# Altium PCB Solo Board1.PcbDoc
Units mil, origin at the board's own origin, x right, y up, seen from the top; angles counter-clockwise.
Board outline 1985.03 x 3045.03 mil, 4 copper layers (Top Layer, Layer 1, Layer 2, Bottom Layer), stack 23.756 mil thick; 35 components, 31 nets, 168 pads, 5 vias.
Unrouted connection lines stored in the file: 40.
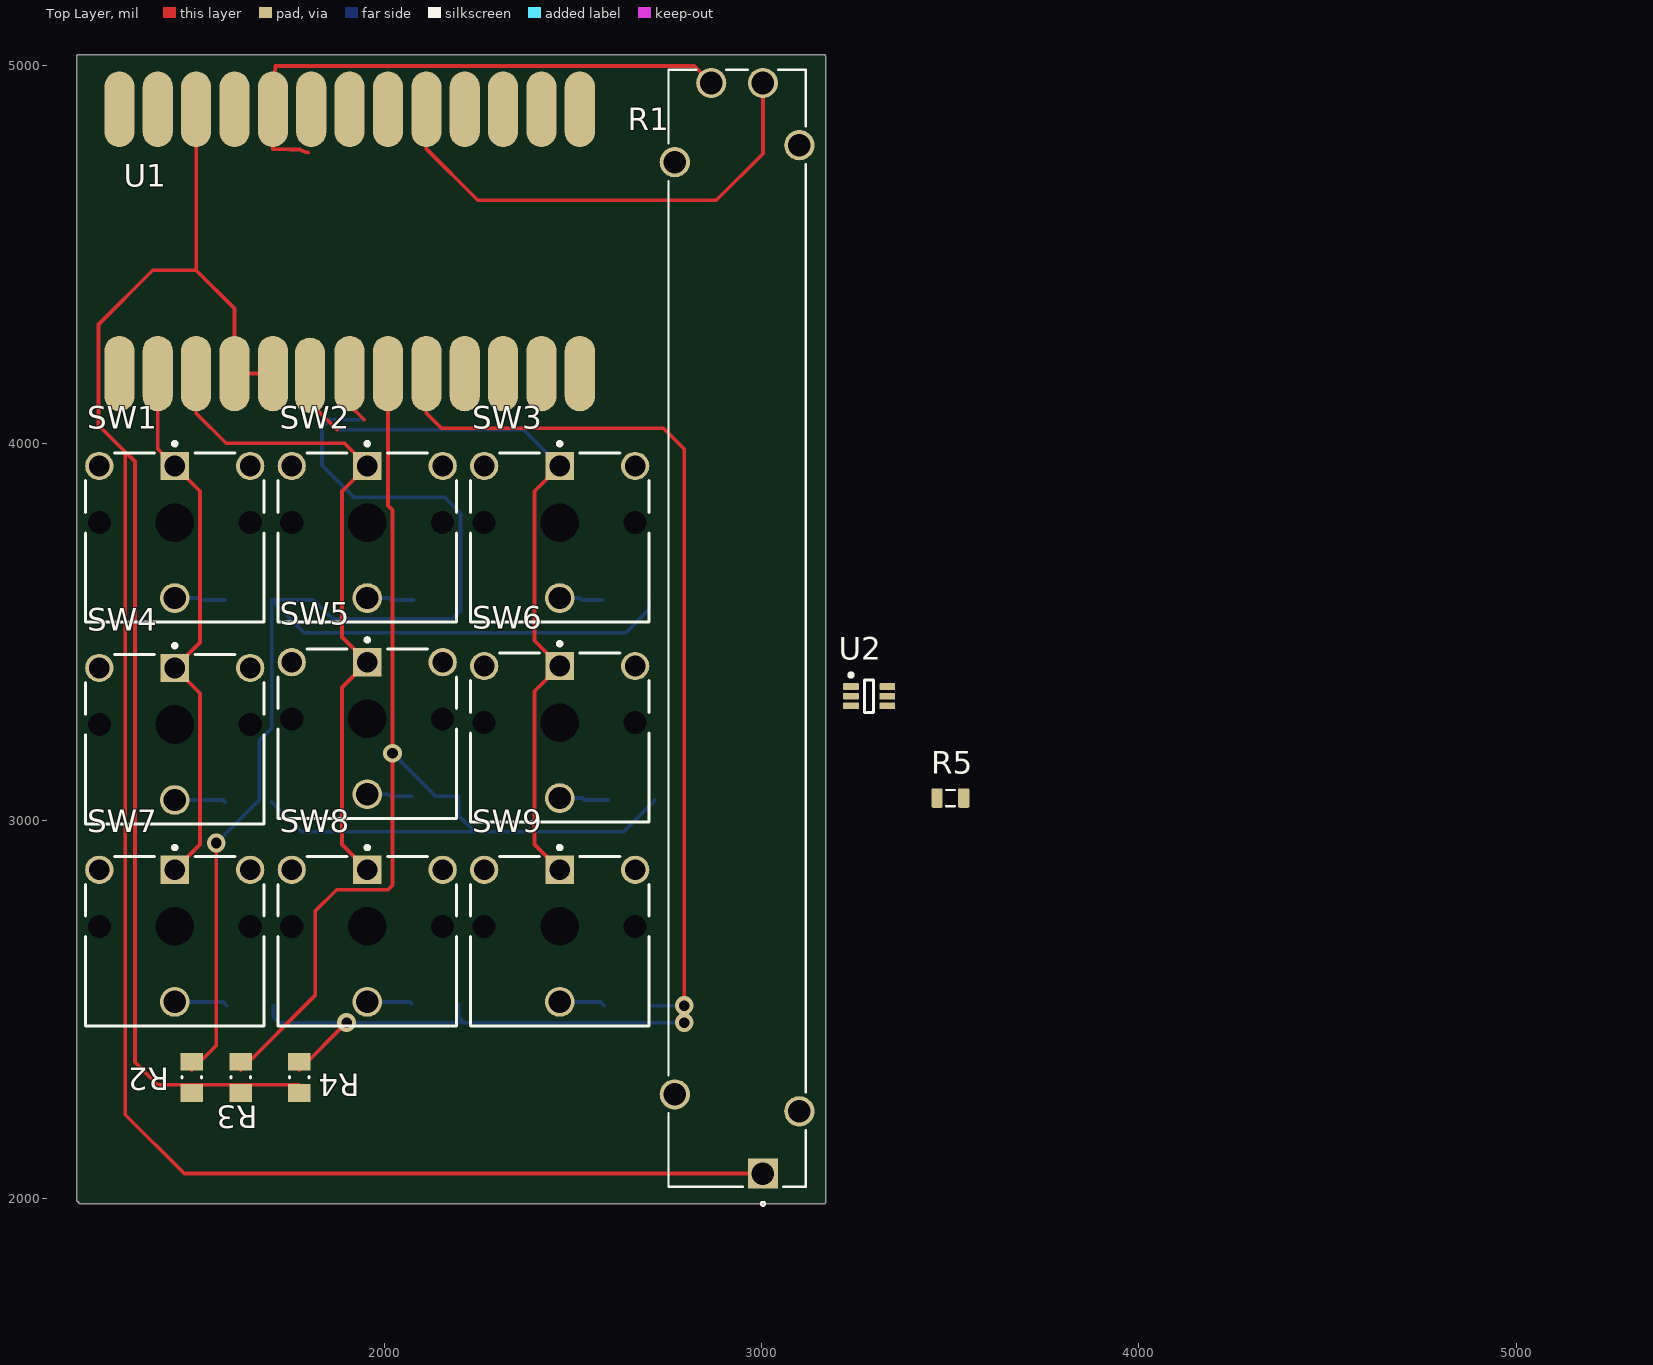
[diagram p0: Top Layer view]
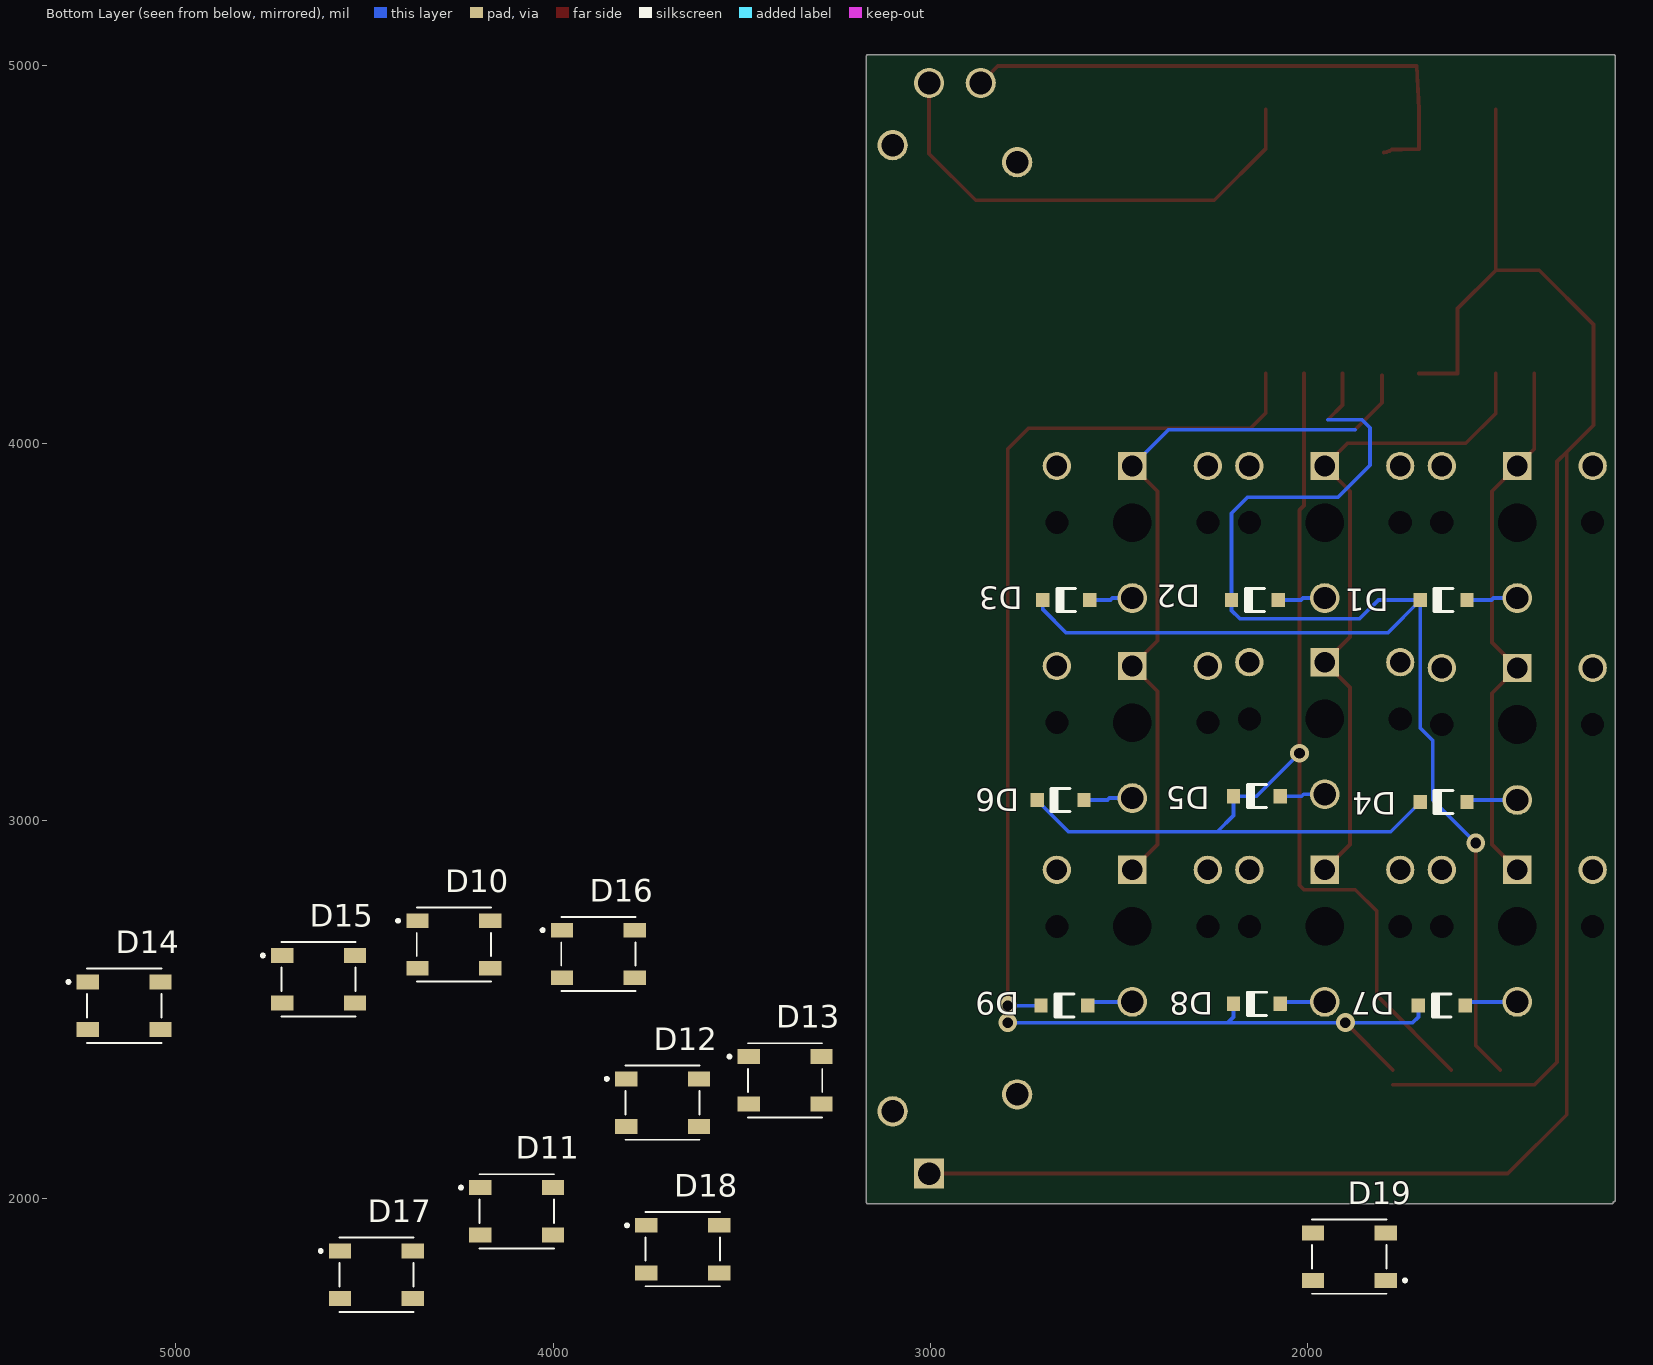
[diagram p1: Bottom Layer view, seen from below]
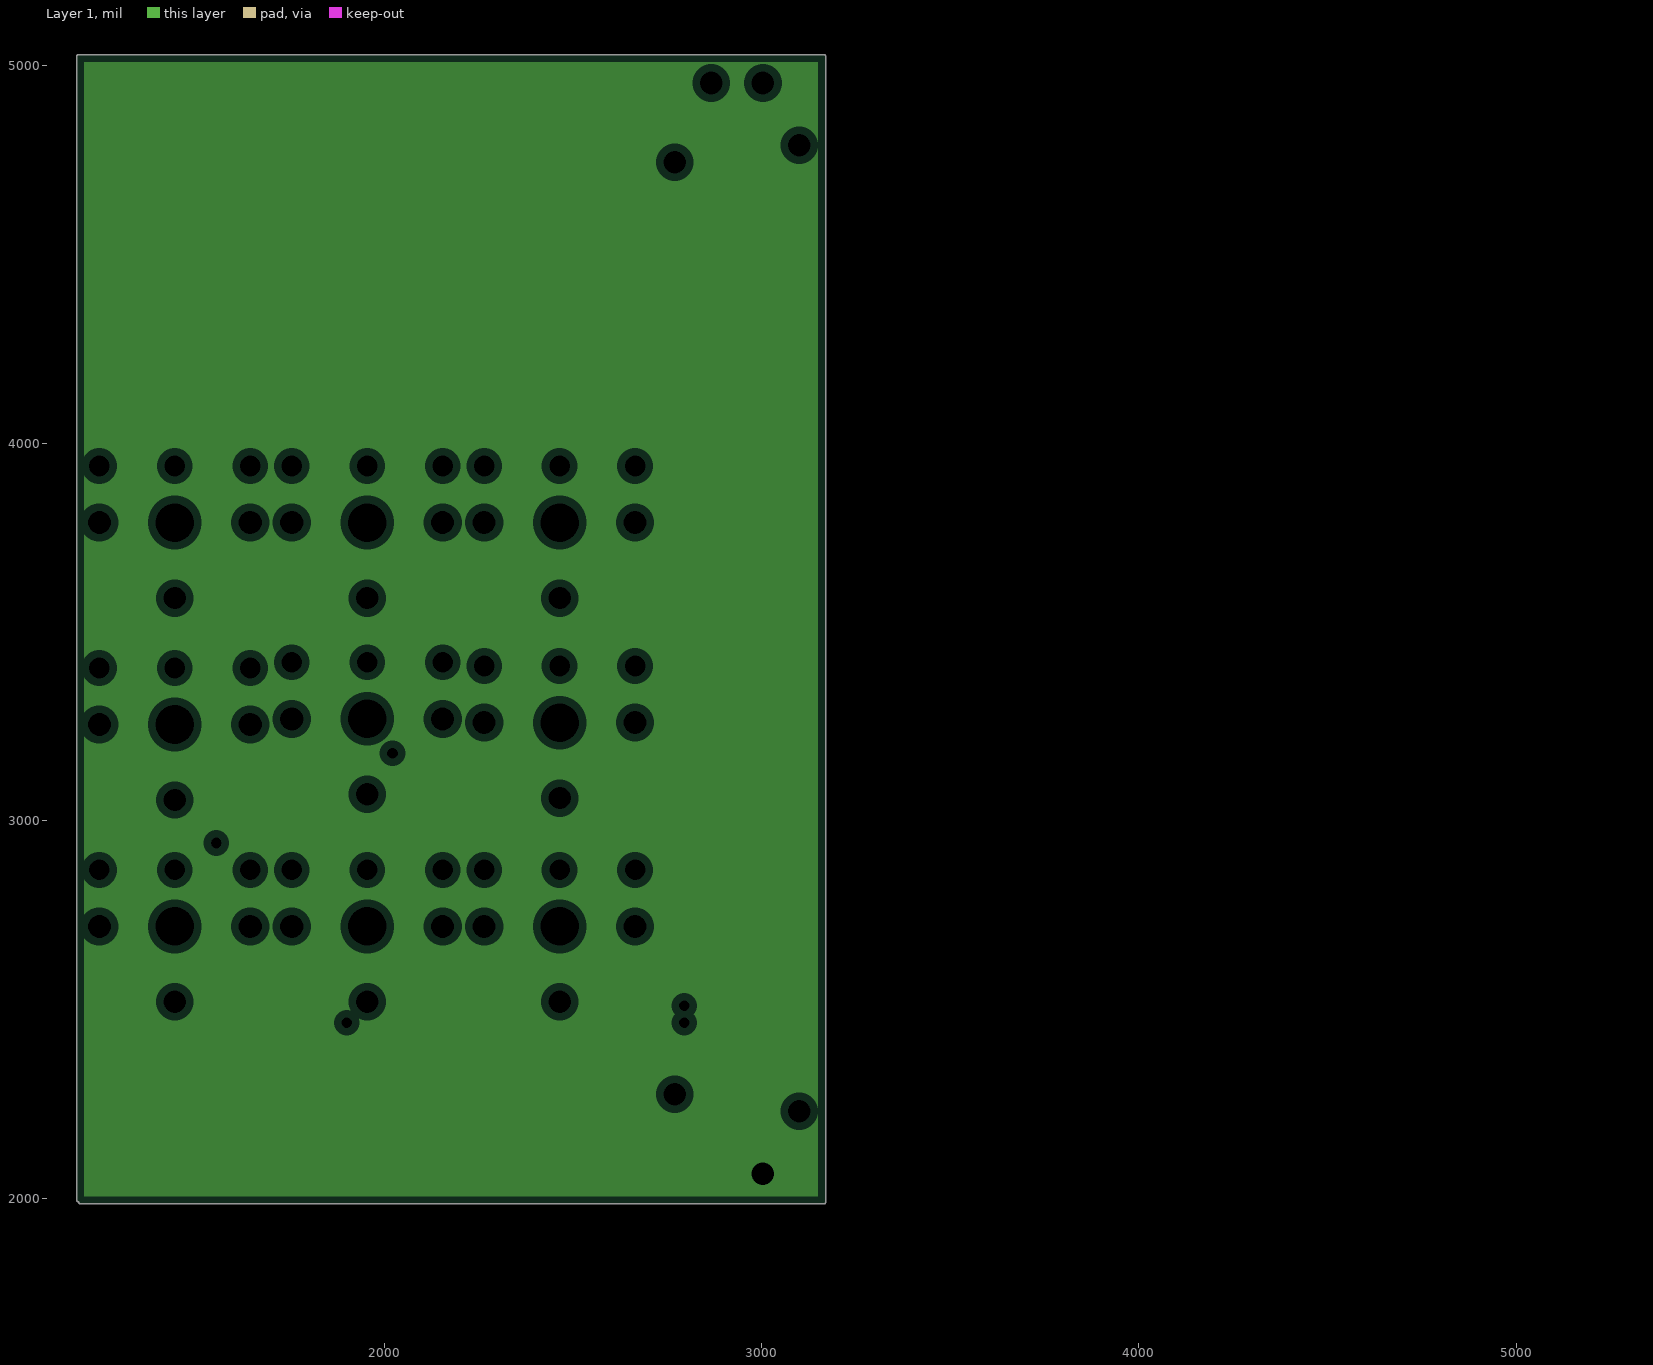
[diagram p2: Layer 1, clearances drawn from the general rule]
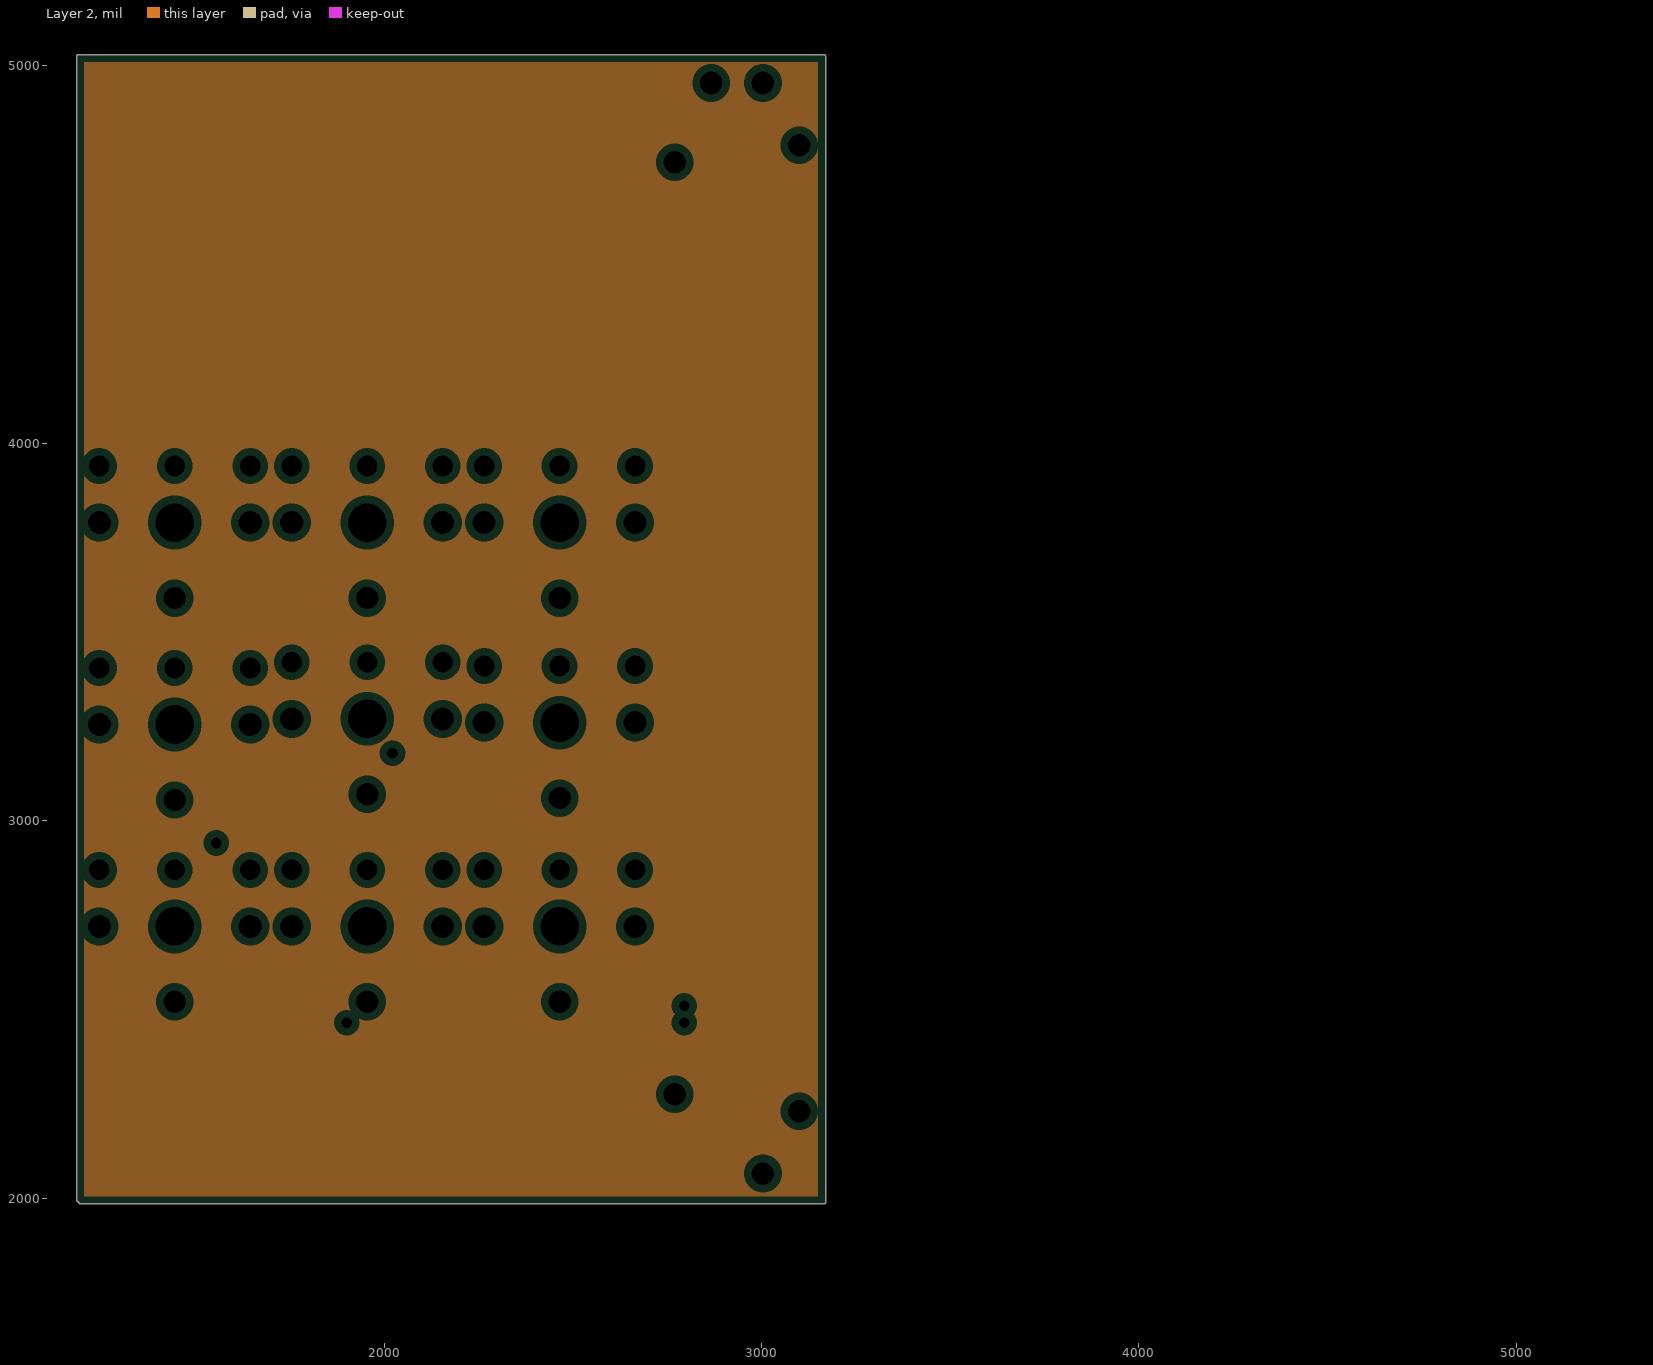
[diagram p3: Layer 2, clearances drawn from the general rule]

## Layer stack, top to bottom
Top Solder: solder mask 0.4, Solder Resist, Dk 3.5
Top Layer: signal copper 1.4
Dielectric 2: prepreg 2.8, PP-006, Dk 4.1
Layer 1: plane copper 1.378, net GND
Dielectric 1: dielectric 12.6, FR-4, Dk 4.8
Layer 2: plane copper 1.378, net +5
Dielectric 3: prepreg 2.8, PP-006, Dk 4.1
Bottom Layer: signal copper 1.4
Bottom Solder: solder mask 0.4, Solder Resist, Dk 3.5

## Board outline
1189.98,1989.98 cw(c1190,1995) 1184.98,1995 1184.98,2120 1184.98,5025 cw(c1190,5025) 1190,5030.02 3165,5030.02 cw(c3165,5025) 3170.01,5025 3170.01,1995 3170.01,1990 cw(c3165,1990) 3165,1984.98 1195,1984.98 cw(c1195,1990)

## Design rules (kind name [scope] priority, off if disabled: settings)
Clearance [All] p1: gap=10 ignorepadtopadclearanceinfootprint=FALSE
PlaneClearance [All] p1: clearance=20
PlaneConnect [All] p1: planeconnectstyle=Relief reliefexpansion=20 reliefentries=4 reliefconductorwidth=10 reliefairgap=10
PolygonConnect [All] p1: connectstyle=Relief reliefconductorwidth=10 reliefentries=4 polygonreliefangle="90 Angle" airgapwidth=10
RoutingVias [All] p1: holewidth=28 width=50 viastyle="Through Hole" minholewidth=28 minwidth=50 maxholewidth=28 maxwidth=50
SolderMaskExpansion [All] p1: expansion=4 istentingtop=FALSE
SupplyNets "Schematic Supply Nets_2" [InNet('+5')] p1: voltage=0.000
SupplyNets "Schematic Supply Nets_1" [InNet('GND')] p2: voltage=0.000
SupplyNets "Schematic Supply Nets" [InNet('3V3')] p3: voltage=0.000
Width [All] p1: maxlimit=10 minlimit=10 preferedwidth=10
28 further rules are at their usual default settings.

## Components (designator, comment, footprint, x,y, rotation, side; value= is the part's Value field where it differs from the comment)
D1 "1N4148W-7-F" DIOD-SOD123-2_V 1640,3585 r0 bottom
D2 "1N4148W-7-F" DIOD-SOD123-2_V 2140,3585 r0 bottom
D3 "1N4148W-7-F" DIOD-SOD123-2_V 2640,3585 r0 bottom
D4 "1N4148W-7-F" DIOD-SOD123-2_V 1640,3050 r0 bottom
D5 "1N4148W-7-F" DIOD-SOD123-2_V 2135,3065 r0 bottom
D6 "1N4148W-7-F" DIOD-SOD123-2_V 2655,3055 r0 bottom
D7 "1N4148W-7-F" DIOD-SOD123-2_V 1645,2510 r0 bottom
D8 "1N4148W-7-F" DIOD-SOD123-2_V 2135,2515 r0 bottom
D9 "1N4148W-7-F" DIOD-SOD123-2_V 2645,2510 r0 bottom
D10 "1655" LED_1655 4262.76,2672.01 r180 bottom
D11 "1655" LED_1655 4096.3,1965 r180 bottom
D12 "1655" LED_1655 3709.84,2252.99 r180 bottom
D13 "1655" LED_1655 3384.84,2312.01 r180 bottom
D14 "1655" LED_1655 5136.3,2510 r180 bottom
D15 "1655" LED_1655 4621.3,2580 r180 bottom
D16 "1655" LED_1655 3879.84,2647.01 r180 bottom
D17 "1655" LED_1655 4467.76,1797.01 r180 bottom
D18 "1655" LED_1655 3656.3,1865 r180 bottom
D19 "1655" LED_1655 1890,1845 r0 bottom
R1 "PTA6043-2015DPB103" POT_PTA6043 3003.5,2065 r180 top
R2 "Resistor 10k +/-1% 0805 125 mW" RESC2013X50X35ML15T15 1490,2320 r90 top value=10k
R3 "Resistor 10k +/-1% 0805 125 mW" RESC2013X50X35ML15T15 1620,2320 r90 top value=10k
R4 "Resistor 10k +/-1% 0805 125 mW" RESC2013X50X35ML15T15 1775,2320 r90 top value=10k
R5 "Resistor 470R +/-5% 0805 125 mW" RESC0805(2012)_L 3500.43,3060 r0 top value=470
SW1 "ML1A-11JW" CHRY-ML1A-11JW_V 1445,3790 r0 top
SW2 "ML1A-11JW" CHRY-ML1A-11JW_V 1955,3790 r0 top
SW3 "ML1A-11JW" CHRY-ML1A-11JW_V 2465,3790 r0 top
SW4 "ML1A-11JW" CHRY-ML1A-11JW_V 1445,3255 r0 top
SW5 "ML1A-11JW" CHRY-ML1A-11JW_V 1955,3270 r0 top
SW6 "ML1A-11JW" CHRY-ML1A-11JW_V 2465,3260 r0 top
SW7 "ML1A-11JW" CHRY-ML1A-11JW_V 1445,2720 r0 top
SW8 "ML1A-11JW" CHRY-ML1A-11JW_V 1955,2720 r0 top
SW9 "ML1A-11JW" CHRY-ML1A-11JW_V 2465,2720 r0 top
U1 "KB2040" KB2040 1258.33,4180 r0 top
U2 "SN74LVC1T45DCKR" DCK0006A_M 3285,3330 r0 top

## Footprints (in the part's own frame and the unit in brackets; to place one, negate y for a bottom-side part, rotate by r counter-clockwise, add the part's x,y. Pads: shape width x height; smd on the part's side, far side on the other; paste and mask are expansions set on the pad)
CHRY-ML1A-11JW_V [mm] "Switch, 4-Leads, Body 12x11.4mm"
  rect 1.9x1.9 hole 1.4 paste-2539.97: 1(0,3.81)
  round 2 hole 1.5 paste-2539.97: 2(0,-5.08)
  round 1.9 hole 1.4 paste-2539.97: 3(-5.08,3.81) 4(5.08,3.81)
  round 0 hole 2.6 unplated paste-2539.97: MH1(0,0)
  round 0 hole 1.55 unplated paste-2539.97: MH2(-5.08,0) MH3(5.08,0)
  silkscreen extent -6,-6.7 6,5.43, body extent -6,-6.7 6,4.7, height 6.9
DCK0006A_M [mm] "SOT23, 6-Leads, Body 2.15x1.4mm, Pitch 0.65mm, IPC Low Density"
  rrect22% 1.05x0.45 smd: 1(-1.225,0.65) 2(-1.225,0) 3(-1.225,-0.65) 4(1.225,-0.65) 5(1.225,0) 6(1.225,0.65)
  silkscreen extent -1.35,-1.1 0.3,1.55, body extent -1.14,-1 1.14,1, height 0.94
DIOD-SOD123-2_V [mm] "SOD123, 2-Leads, Body 2.7x1.55mm, Height 1.45mm"
  rect 0.9x0.95 smd: 1(-1.575,0) 2(1.575,0)
  silkscreen extent -0.64,-0.82 0.64,0.78, body extent -1.35,-0.77 1.35,0.77, height 1.45
KB2040 [mil]
  oval 80x200 smd: 107(40,5) 108(141.67,5) 109(243.33,5) 110(345,5) 111(446.67,5) 112(545,0) 113(650,5) 114(751.67,5) 115(853.33,5) 116(955,5) 117(1056.67,5) 118(1158.33,5) 119(1260,5) 120(40,705) 121(141.67,705) 122(243.33,705) 123(345,705) 124(446.67,705) 125(548.33,705) 126(650,705) 127(751.67,705) 128(853.33,705) 129(955,705) 130(1056.67,705) 131(1158.33,705) 132(1260,705)
  body extent -48,0 1298,700, height 188
LED_1655 [mm]
  rect 1.5x1 smd: 1(-2.45,1.6) 2(-2.45,-1.6) 3(2.45,-1.6) 4(2.45,1.6)
  silkscreen extent -3.85,-2.5 2.5,2.5
POT_PTA6043 [mil]
  rect 80x80 / inner round 60 / far side rect 80x80 hole 60 paste-99999 mask+0: 1(0,0)
  round 80 / inner round 60 / far side round 80 hole 60 paste-99999 mask+0: 2(0,-2890) 3(137,-2890) 4(-96.5,-165) 5(-96.5,-2725) 6(233.5,-210) 7(233.5,-2680)
  silkscreen extent -114,-2925 251,85
RESC0805(2012)_L [mm] "Chip Resistor, Body 2.0x1.3mm, IPC High Density"
  rrect25% 0.76x1.3 smd: 1(-0.9,0) 2(0.89,0)
  silkscreen extent -0.3,-0.55 0.3,0.55, body extent -1,-0.62 1,0.63, height 0.6
RESC2013X50X35ML15T15 [mm] "Chip Resistor, 2-Leads, Body 2.2x1.4mm, IPC Low Density"
  rect 1.2x1.5 smd: 1(-1.05,0) 2(1.05,0)
  silkscreen extent -0.05,-0.65 0.05,0.65, body extent -1.1,-0.7 1.1,0.7, height 0.5

## Part data
D1 D2 D3 D4 D5 D6 D7 D8 D9: library part CMP-2000-04932-2, "Fast Switching Diode, 100 V, 0.15 A, -65 to 150 degC, 2-Pin?SOD123, RoHS, Tape and Reel", If - Forward Current=0.15A, Ir - Reverse Current=1uA, Manufacturer=DiodesIncorporated, Max Surge Current=2A, Maximum Operating Temperature=+150C, Minimum Operating Temperature=-65C, Operating Temperature Range=-65Cto+150C, Package / Case=SOD-123, Package Reference=SOD123-2, Peak Reverse Voltage=100V, Vf - Forward Voltage=1.25V, Brand=DiodesIncorporated, Configuration=Single, Datasheet URL=http://www.farnell.com/datasheets/1915529.pdf, Datasheet Version="Rev. 24-2, 10/2013", Factory Pack Quantity=3000, Height=1.25mm, Length=2.85mm, Manufacturer URL=http://www.diodes.com/, Mounting Style=SMD/SMT, Package URL=http://www.diodes.com/datasheets/ds18004.pdf, Packaging=Reel, Product=SwitchingDiodes, Product Category=Diodes-GeneralPurpose,Power,Switching, Recovery Time=4ns, RoHS=True, Series=1N4148, Type=SwitchingDiode, Unit Weight=0.000353oz, Width=1.7mm
D10 D11 D12 D13 D14 D15 D16 D17 D18 D19: library part CMP-004-00031-1, "Ws2812b 5050 Rgb Led With Integrated Driver Chip Pack Of 10", Case/Package=None, Availability=Unavailable, Component Type=Standard, Design Item ID=1655, MP=1655, Pins=4, Price=None, Source=1655.SchLib
R1: "No Description Available", Mfr_Name="Bourns Electronics"
R2 R3 R4: library part CMP-009-00018-5, "Chip Resistor, 10 KOhm, +/- 1%, 125 mW, -55 to 155 degC, 0805 (2012 Metric)", Case/Package=0805, Max Operating Temperature=155°C, Min Operating Temperature=-55°C, Power=125mW, Tolerance=1%, Voltage Rating=150V, Mounting Technology=SM, Pins=2, RoHS Compliant=True
R5: library part CMP-009-00122-3, "Chip Resistor, 470 Ohms, +/-5%, 125 mW, -55 to 155 degC, 0805", Case/Package=0805, Max Operating Temperature=155°C, Min Operating Temperature=-55°C, Power=125mW, Tolerance=5%, Pins=2
SW1 SW2 SW3 SW4 SW5 SW6 SW7 SW8 SW9: library part CMP-2000-06718-1, "Keyboard Switch, SPST, IP40, 12 V Max, 10 mA Max, -40 to 70 degC, 4-Pin THD, RoHS, Bulk", Actuator Color=N/A, Dielectric Strength=500VAC, Illumination Color=N/R, IP Rating=IP40, Manufacturer=Cherry, Maximum AC Voltage Rating=12V, Maximum Current Rating=0.01A, Minimum Insulation Resistance=100MOhm, Operating Force=0.45N, Operating Speed=400mm/s, Operating Temperature=-10to70C, Package Description="4-Pin Through Hole Switch, Body 12 x 11.4 mm", Part No=ML1A11JW, Actuator Length=3mm, Actuator Material=N/A, Actuator Style=Button, Body Orientation=Straight, Contact Material=Gold/Silver, Contact Plating=N/A, COO=UK, Datasheet URL=http://www.cherry.de/PDF/EN_CHERRY_ML1A-xxxx.pdf, Datasheet Version=12/2015, Dimension=12x11.4x6.9mm, ECCN=EAR99, Electrical Life=N/A, Family=ML, Housing Material=N/A, HTS=8536509065, Illumination Type=N/R, Manufacturer URL=http://cherryswitches.com/cn/, Maximum DC Voltage Rating=12V, Maximum Power Rating=N/A, Mechanical Life=N/A, Mounting=ThroughHole, Mounting Technology=ThroughHole, Number of Terminals=2, Package Reference=ML1A-11JW, Package URL=http://cherryamericas.com/wp-content/uploads/2014/12/ml_cat.pdf, Packaging=N/A, Pole Throw Configuration=SPST, RoHS=Unknown, Row Spacing=10.16mm, Supplier=CherryElectrical, Switch Configuration=N/A, Terminal Pitch=N/R, Terminal Type=PCPins, Total Travel=3mm, Type=N/A
U1: "Keyboard IC breakour board", ComponentLink1Description=Datasheet, ComponentLink1URL=https://learn.adafruit.com/adafruit-kb2040/overview
U2: library part CMP-0859-00452-3, "Single-Bit Dual-Supply Bus Transceiver with Configurable Voltage Translation and 3-State Outputs, DCK0006A, LARGE T&R", F @ Nom Voltage(Max)(Mhz)=150, Generic Part Number=SN74LVC1T45, ICC @ Nom Voltage(Max)(mA)=0.004, Manufacturer="Texas Instruments", Operating Temperature Range(C)="-40 to 85", Rating=Catalog, tpd @ Nom Voltage(Max)(ns)=15.5,8,5.8,4.4, Voltage(Nom)(V)=1.8,2.5,3.3,5, 3-State Output=Yes, Bits(#)=1, DatasheetVersion=SCES515K, Input Type=CMOS/TTL, Logic=True, Output Drive (IOL/IOH)(Max)(mA)=32/-32, Output Type=CMOS, PackageReference=DCK0006A, Schmitt Trigger=No, Sub-Family="Dual Supply Translator", Technology Family=LVC, VCC(Max)(V)=5.5, VCC(Min)(V)=1.65

## Via types
v1: diameter 50, hole 28, Top Layer to Bottom Layer, 5 vias

## Nets (pads, with @x,y where several pads share a name; then routed paths per layer and width w, separated by ;. In a path a pad name is that pad's centre, name@x,y a point inside that pad or via, vN(x,y) a via of type N, cw(c..) or ccw(c..) an arc to the next point about the centre after c; other vN are vias at no path point)
3V3: R1.3 U1.124 U2.1 U2.5 | length 1490.7
  Top Layer w10: 1798.59,4770.6 cw(c1806.67,4825) 1776.91,4778.74 1752,4778.74 1751.74,4779 1705,4779 U1.124 1711,5000 2821.5,5000 R1.3
+5: D10.3 D11.3 D12.3 D13.3 D14.3 D15.3 D16.3 D17.3 D18.3 D19.3 U1.121 U2.6
GND: D10.1 D11.1 D12.1 D13.1 D14.1 D15.1 D16.1 D17.1 D18.1 D19.1 R1.1 R2.1 R3.1 R4.1 U1.110 U1.111 U1.122 U2.2 | length 7218.3
  Top Layer w10: R2.1@1490,2300.32 1399.06,2300.32 ; U1.122 1501.67,4458.67 ; U1.111 U1.110 1603.33,4357 1501.67,4458.67 ; R4.1@1775,2300.32 1697,2300.32 1620,2300.31 1399.06,2300.31 ; R1.1 1470,2065 1314,2221 1314,3977 ; 1314,3977 1339.37,3951.63 1339.37,2360 1399.06,2300.32 ; 1314,3977 1243,4048 1243,4315 1386.67,4458.67 1501.67,4458.67
LED_Din: U1.132 U2.3
LIN_POT: R1.2 U1.128 | length 1291.8
  Top Layer w10: U1.128 2111.67,4780 2247.67,4644 2880,4644 3003.5,4767.5 R1.2
NetD1_1: D1.1 SW1.2 | length 135.1
  Bottom Layer w10: SW1.2 1508,3590 1513,3585 D1.1
NetD2_1: D2.1 SW2.2 | length 125.1
  Bottom Layer w10: SW2.2 2013,3590 2018,3585 D2.1
NetD3_1: D3.1 SW3.2 | length 115.1
  Bottom Layer w10: SW3.2 2518,3590 2523,3585 D3.1
NetD4_1: D4.1 SW4.2 | length 135.1
  Bottom Layer w10: SW4.2 1572.99,3055 D4.1
NetD5_1: D5.1 SW5.2 | length 120.1
  Bottom Layer w10: SW5.2 2011,3070 2016,3065 D5.1
NetD6_1: D6.1 SW6.2 | length 130.1
  Bottom Layer w10: SW6.2 2526,3060 2531,3055 D6.1
NetD7_1: D7.1 SW7.2 | length 142.1
  Bottom Layer w10: SW7.2 1572.99,2520 D7.1
NetD8_1: D8.1 SW8.2 | length 120.1
  Bottom Layer w10: SW8.2 2067.99,2520 D8.1
NetD9_1: D9.1 SW9.2 | length 122.1
  Bottom Layer w10: SW9.2 2572.99,2520 D9.1
NetD10_2: D10.2 R5.2
NetD10_4: D10.4 D11.2
NetD11_4: D11.4 D12.2
NetD12_4: D12.4 D13.2
NetD13_4: D13.4 D17.2
NetD14_2: D14.2 D19.4
NetD14_4: D14.4 D15.2
NetD15_4: D15.4 D16.2
NetD17_4: D17.4 D18.2
NetD18_4: D18.4 D19.2
NetR5_1: R5.1 U2.4
READ0: SW1.1 SW4.1 SW7.1 U1.108 | length 1444.6
  Top Layer w10: U1.108 1400,3985 SW1.1 1512,3873 1512,3472 SW4.1 1512,3338 1512,2937 SW7.1
READ1: SW2.1 SW5.1 SW8.1 U1.109 | length 1797.3
  Top Layer w10: U1.109 1501.67,4080 1581.47,4000.19 1894.81,4000.19 SW2.1 1888,3873 1888,3487 SW5.1 1888,3353 1888,2937 SW8.1
READ2: SW3.1 SW6.1 SW9.1 U1.112 | length 1984.6
  Top Layer w10: U1.112 1803.33,4107.49 1875,4035.82 ; SW9.1 2398,2937 2398,3343 SW6.1 2398,3477 2398,3873 SW3.1
  Bottom Layer w10: 1875,4035.82 2369.18,4035.82 SW3.1
SCAN0: D1.2 D2.2 D3.2 R2.2 U1.113 | length 3986.2
  Top Layer w10: R2.2@1490,2339.69 1555,2404.69 v1(1555,2941) ; U1.113 1908.33,4101.67 1947.35,4062.65
  Bottom Layer w10: v1(1555,2941) 1669,3055 1669,3213 1702.01,3246.01 D1.2@1702.01,3584.02 ; 1947.35,4062.65 1856.09,4062.65 1835,4041.57 1835,3942 1920,3857 2160,3857 2202,3815 D2.2 2202.01,3557.01 2180,3535 1863,3535 1813,3585 D1.2 D1.2@1702.01,3584.02 ; D3.2 2702.01,3559.87 2640,3497.87 1788.16,3497.87 D1.2@1702.01,3584.02
SCAN1: D4.2 D5.2 D6.2 R3.2 U1.114 | length 3514.4
  Top Layer w10: R3.2@1620,2339.69 1817,2536.69 1817,2760 1874,2817 2010,2817 2022,2829 v1(2022,3179) 2022,3823 2010,3835 U1.114
  Bottom Layer w10: D4.2 1702.01,3049.02 1780.17,2970.86 2240,2970.86 ; v1(2022,3179) 2136,3065 D5.2 2197.01,3013.85 2240,2970.86 ; D6.2 2717.01,3054.02 2633.85,2970.86 2240,2970.86
SCAN2: D7.2 D8.2 D9.2 R4.2 U1.115 | length 3793.3
  Top Layer w10: R4.2@1775,2339.69 v1(1900.31,2465) ; U1.115 2111.67,4080 2151.67,4040 2740,4040 2795,3985 v1(2795,2510) v1(2795,2465)
  Bottom Layer w10: D7.2 1707.01,2480 1722.01,2465 v1(1900.31,2465) 2212.01,2465 ; D8.2 2197.01,2480 2212.01,2465 ; D9.2 v1(2795,2510) ; v1(2795,2465) 2212.01,2465
pads on no net: D16.4 R1.4 R1.5 R1.6 R1.7 SW1.3 SW1.4 SW1.MH1 SW1.MH2 SW1.MH3 SW2.3 SW2.4 SW2.MH1 SW2.MH2 SW2.MH3 SW3.3 SW3.4 SW3.MH1 SW3.MH2 SW3.MH3 SW4.3 SW4.4 SW4.MH1 SW4.MH2 SW4.MH3 SW5.3 SW5.4 SW5.MH1 SW5.MH2 SW5.MH3 SW6.3 SW6.4 SW6.MH1 SW6.MH2 SW6.MH3 SW7.3 SW7.4 SW7.MH1 SW7.MH2 SW7.MH3 SW8.3 SW8.4 SW8.MH1 SW8.MH2 SW8.MH3 SW9.3 SW9.4 SW9.MH1 SW9.MH2 SW9.MH3 U1.107 U1.116 U1.117 U1.118 U1.119 U1.120 U1.123 U1.125 U1.126 U1.127 U1.129 U1.130 U1.131

## Polygon pours and split planes (outlines as drawn)
GND on Layer 1 (split plane): 3149.92,2005.08 1205.08,2005.08 1205.08,2120 1205.08,5009.92 3149.92,5009.92
+5 on Layer 2 (split plane): 3149.92,2005.08 1205.08,2005.08 1205.08,2120 1205.08,5009.92 3149.92,5009.92

## Silkscreen, mask and mechanical layers (free items; w line width, h text height)
Mechanical 1:
  lines w10: 3165,1990 1195,1990 1190,1995 1190,2120 1190,5025 3165,5025 3165,1995